# EAGLE board 44780_LCD-v1 (EAGLE 5.06)
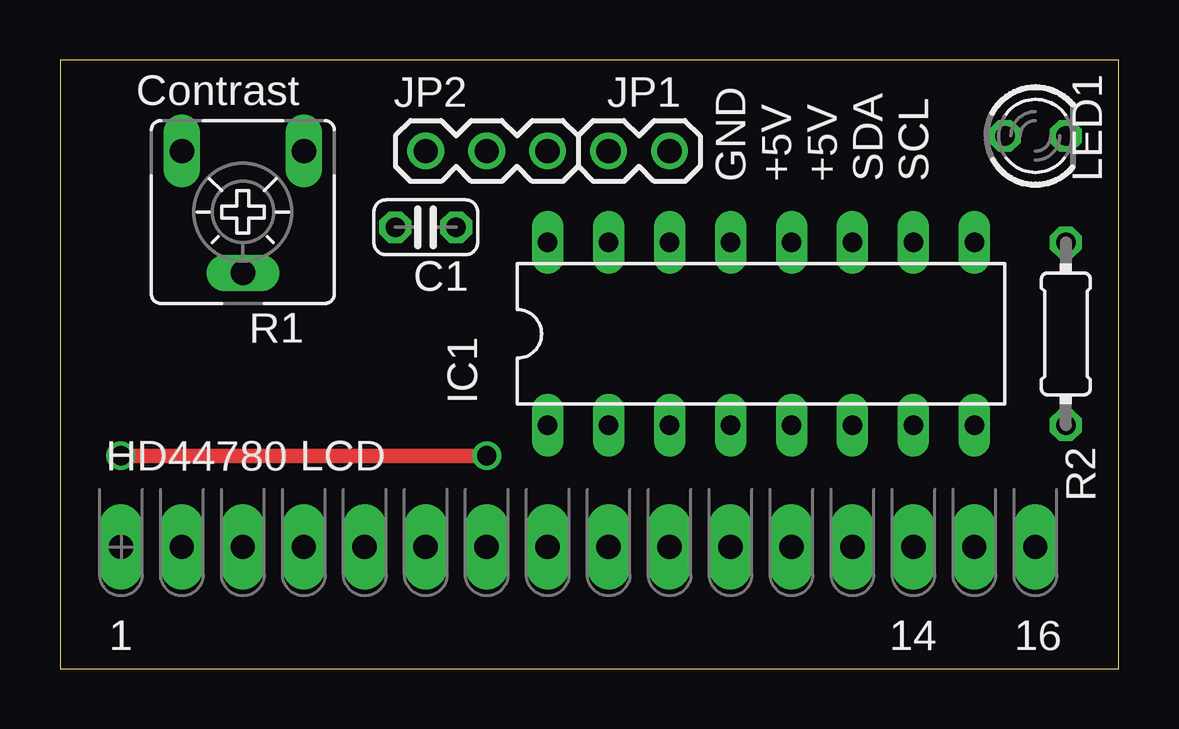
[diagram p0: board, top side]
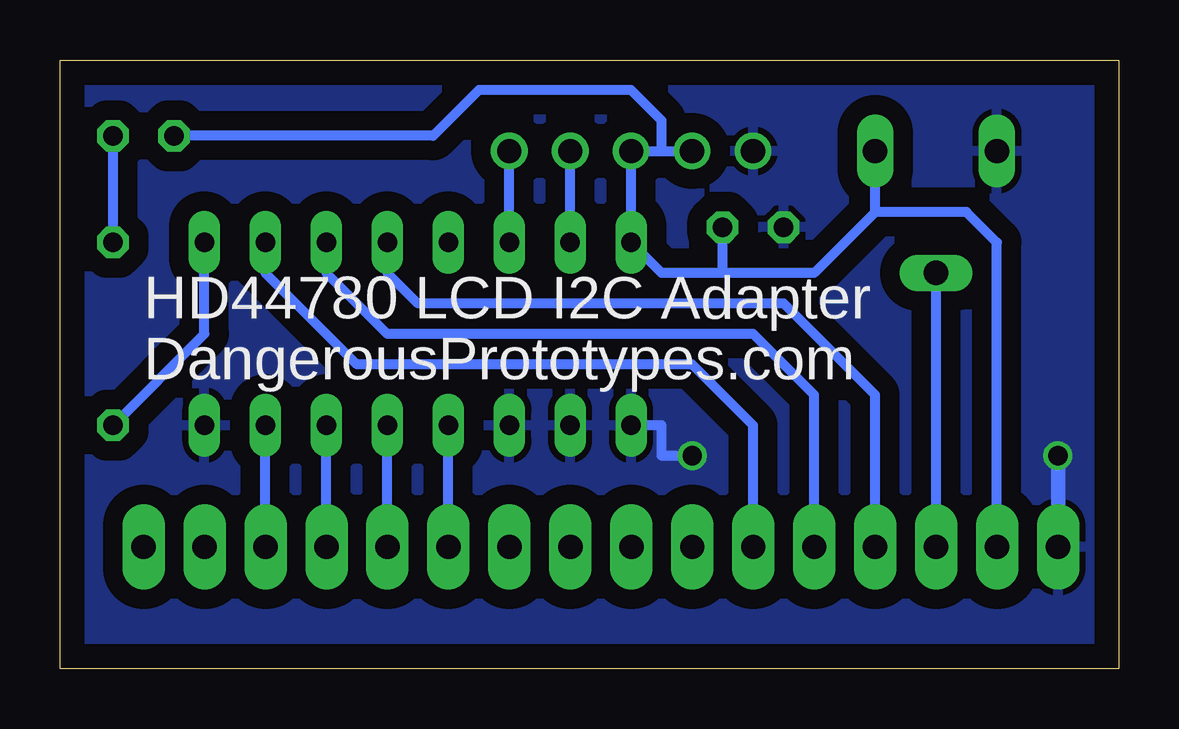
[diagram p1: board, bottom side, seen from below]

Size 44.12 x 25.39 mm. Coordinates in mm from the lower left corner, seen from the top.
Outline: 0,0 44.12,0 44.12,25.39 0,25.39 0,0
Copper layers (1*16): Top 0.035mm / dielectric 1.5mm / Bottom 0.035mm
Design rules "default": minimum track width 10mil, minimum drill 24mil, track to track 8mil, track to pad 8mil, pad to pad 8mil, via to via 8mil, smd to smd 8mil, copper to edge 40mil, drill to drill 8mil, minimum pad ring 10mil, minimum via ring 8mil, stop-mask expansion 4mil, vias tented up to drill 0mil, thermal gap 10mil

## Footprints (pad centres in the part's own frame; a part is rotated, then mirrored left to right if it is on the bottom)
C025-024X044 = drill 0.813 octagon: 1 -1.27,0; 2 1.27,0
DIL16 = drill 0.813 long: 1 -8.89,-3.81; 2 -6.35,-3.81; 3 -3.81,-3.81; 4 -1.27,-3.81; 5 1.27,-3.81; 6 3.81,-3.81; 7 6.35,-3.81; 8 8.89,-3.81; 9 8.89,3.81; 10 6.35,3.81; 11 3.81,3.81; 12 1.27,3.81; 13 -1.27,3.81; 14 -3.81,3.81; 15 -6.35,3.81; 16 -8.89,3.81
1X02 = drill 1.016 round: 1 0,0; 2 2.54,0
1X03 = drill 1.016 round: 1 0,0; 2 2.54,0; 3 5.08,0
HD44780 = drill 1.016 pad 1.778 long: 1 -20.325,0.007; 2 -17.785,0.007; 3 -15.245,0.007; 4 -12.705,0.007; 5 -10.165,0.007; 6 -7.625,0.007; 7 -5.085,0.007; 8 -2.545,0.007; 9 -0.005,0.007; 10 2.535,0.007; 11 5.075,0.007; 12 7.615,0.007; 13 10.155,0.007; 14 12.695,0.007; 15 15.235,0.007; 16 17.775,0.007
LED3MM = drill 0.813 octagon: A -1.27,0; K 1.27,0
CA6V = drill 1.016 long: A -2.54,-2.54; E 2.54,-2.54; S 0,2.54
0204/7 = drill 0.813 octagon: 1 -3.81,0; 2 3.81,0

## Placement (x,y rotation side)
C1  0.1uF  [C025-024X044]  15.24,18.42 180 top
IC1  PCF8574P  [DIL16]  29.21,13.97 0 top
JP1  [1X02]  22.86,21.59 0 top
JP2  [1X03]  15.24,21.59 0 top
LCD1  HD44780-LCD  [HD44780]  22.86,5.08 0 top
LED1  [LED3MM]  40.64,22.22 0 top
R1  10K  [CA6V]  7.62,19.05 180 top
R2  1K  [0204/7]  41.91,13.97 90 top

## Library data of the parts
C1 R2 = rcl
IC1 = i2c
JP1 JP2 = SparkFun
LCD1 = lcd-hd44780
LED1 = led
R1 = pot

## Nets
D04: IC1.4 LCD1.11
D05: IC1.5 LCD1.12
D06: IC1.6 LCD1.13
D07: IC1.7 LCD1.14
EN: IC1.10 LCD1.6
GND: C1.2 IC1.1 IC1.2 IC1.3 IC1.8 JP2.1 LCD1.1 R1.E
N$8: IC1.14 JP1.2
N$9: IC1.15 JP1.1
N$10: LCD1.3 R1.S
N$12: LED1.K R2.2
N$13: IC1.9 R2.1
RS: IC1.12 LCD1.4
RW: IC1.11 LCD1.5
VCC: C1.1 IC1.16 JP2.2 JP2.3 LCD1.2 LED1.A R1.A

## Tracks (layer width: path | path; a pad name or v marks a point on that pad's centre or on a via)
D04
  Bottom 0.406: LCD1.11 27.94,4.32 | LCD1.11 IC1.4 | LCD1.11 | LCD1.11
D05
  Bottom 0.406: LCD1.12 30.48,4.32 | LCD1.12 IC1.5 | LCD1.12 | LCD1.12
D06
  Bottom 0.406: LCD1.13 33.02,4.32 | LCD1.13 IC1.6 | LCD1.13 | LCD1.13
D07
  Bottom 0.406: LCD1.14 35.56,4.32 | LCD1.14 IC1.7 | LCD1.14 | LCD1.14
EN
  Bottom 0.406: IC1.10 35.56,16.51 31.75,12.7 17.78,12.7 15.24,10.16 LCD1.6 | LCD1.6 15.24,3.81 | LCD1.6
GND  (via drill 0.8)
  Top 0.61: v2.54,8.89 v17.78,8.89
  Bottom 0.406: IC1.1 19.05,10.16 19.05,8.89 v17.78,8.89
  Bottom 0.61: v2.54,8.89 v2.53,8.89 LCD1.1
  pour Bottom (isolate 0.813): -1.27,24.13 43.18,24.13 43.18,0 -1.27,0
N$8
  Bottom 0.406: IC1.14 JP1.2
N$9
  Bottom 0.406: IC1.15 JP1.1
N$10
  Bottom 0.406: LCD1.3 R1.S
N$11
  pour Bottom (isolate 0.813): 0,25.4 44.45,25.4 44.45,0 0,0
N$12
  Bottom 0.406: R2.2 LED1.K
N$13
  Bottom 0.406: R2.1 38.1,13.97 IC1.9
RS
  Bottom 0.406: LCD1.4 10.16,11.43 13.97,15.24 29.21,15.24 30.48,16.51 IC1.12 | LCD1.4 | LCD1.4 10.16,4.32
RW
  Bottom 0.406: IC1.11 33.02,16.51 30.48,13.97 15.24,13.97 12.7,11.43 LCD1.5
VCC
  Bottom 0.406: LCD1.2 | LCD1.2 5.08,4.32 | 19.05,21.59 JP2.3 IC1.16 19.05,16.51 16.51,16.51 | 19.05,21.59 JP2.2 | LED1.A 28.57,22.22 26.67,24.13 20.32,24.13 19.05,22.86 19.05,21.59 | 10.16,19.05 R1.A | 16.51,16.51 12.7,16.51 10.16,19.05 | 16.51,16.51 C1.1 | LCD1.2 5.08,17.78 6.35,19.05 10.16,19.05

## Text on the board
tNames: Contrast | GND | +5V | +5V | SDA | SCL | HD44780 LCD
bNames: HD44780 LCD I2C Adapter | DangerousPrototypes.com